# EAGLE board sensor_v3 (EAGLE 7.2.0)
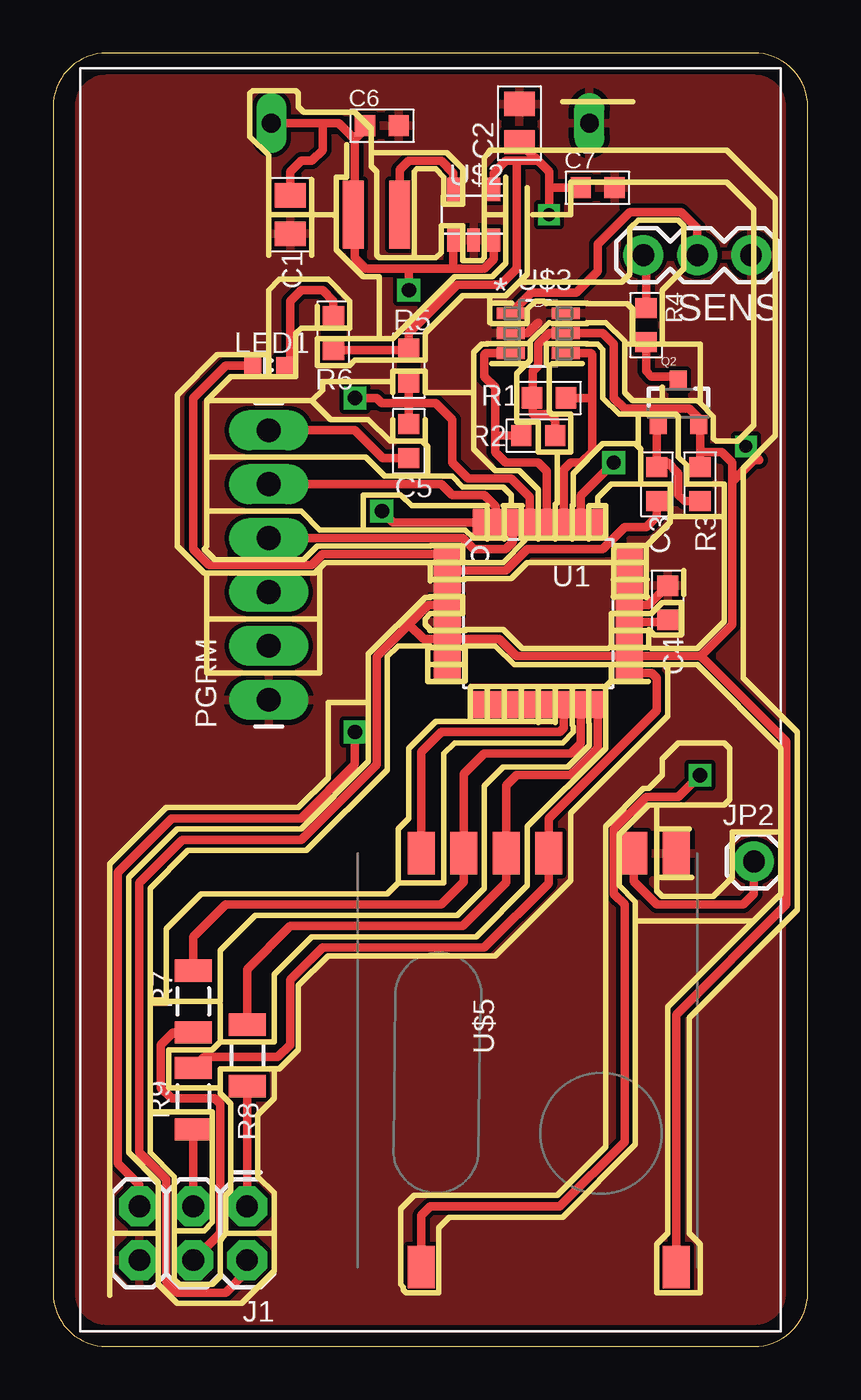
[diagram p0: board, top side]
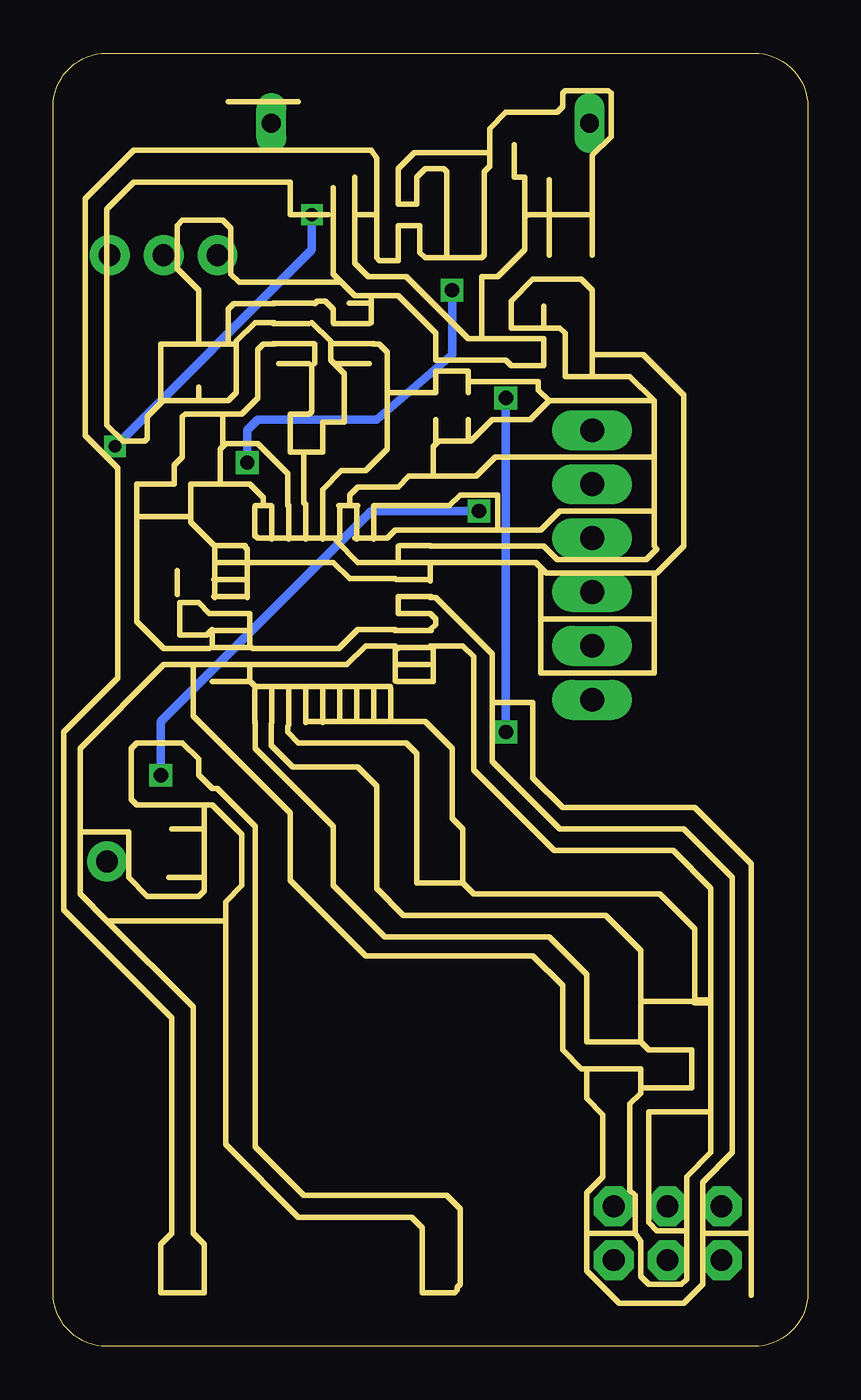
[diagram p1: board, bottom side, seen from below]

Size 35.56 x 60.96 mm. Coordinates in mm from the lower left corner, seen from the top.
Outline: 0,58.42 0,2.54 arc90 2.54,0 33.02,0 arc90 35.56,2.54 35.56,58.42 arc90 33.02,60.96 2.54,60.96 arc90 0,58.42
Copper layers (1*16): Top 0.035mm / dielectric 1.5mm / Bottom 0.035mm
Design rules "default": minimum track width 10mil, minimum drill 24mil, track to track 8mil, track to pad 8mil, pad to pad 8mil, via to via 8mil, smd to smd 8mil, copper to edge 40mil, drill to drill 8mil, minimum pad ring 10mil, minimum via ring 8mil, stop-mask expansion 4mil, vias tented up to drill 0mil, thermal gap 10mil
Milling: 481 lines

## Footprints (pad centres in the part's own frame; a part is rotated, then mirrored left to right if it is on the bottom)
C0805-N = smd 1.15 x 1.45: 1 -0.9,0; 2 0.9,0
C0603-N = smd 0.95 x 1: 1 -0.8,0; 2 0.8,0
2X3 = drill 1.016 pad 1.88 octagon: 1 0,0; 2 0,2.54; 3 2.54,0; 4 2.54,2.54; 5 5.08,0; 6 5.08,2.54
1X01 = drill 1.016 pad 1.88: 1 0,0
LED-0603 = smd 0.8 x 0.8: A 0,-0.75; C 0,0.75
1X06_LONGPADS = drill 1.118 pad 1.88 long: 1 0,0; 2 2.54,0; 3 5.08,0; 4 7.62,0; 5 10.16,0; 6 12.7,0
SOT23-3 = smd 0.8 x 0.9: 1 -0.95,-1; 2 0.95,-1; 3 0,1.1
R0603-N = smd 0.95 x 1: 1 -0.8,0; 2 0.8,0
R1206-N = smd 1.05 x 1.75: 1 -1.45,0; 2 1.45,0
1X03 = drill 1.016 pad 1.88: 1 0,0; 2 2.54,0; 3 5.08,0
TQFP32-08 = smd 1.27 x 0.559: 1 -4.293,2.8; 2 -4.293,2; 3 -4.293,1.2; 4 -4.293,0.4; 5 -4.293,-0.4; 6 -4.293,-1.2; 7 -4.293,-2; 8 -4.293,-2.8; 17 4.293,-2.8; 18 4.293,-2; 19 4.293,-1.2; 20 4.293,-0.4; 21 4.293,0.4; 22 4.293,1.2; 23 4.293,2; 24 4.293,2.8 | smd 0.559 x 1.27: 9 -2.8,-4.293; 10 -2,-4.293; 11 -1.2,-4.293; 12 -0.4,-4.293; 13 0.4,-4.293; 14 1.2,-4.293; 15 2,-4.293; 16 2.8,-4.293; 25 2.8,4.293; 26 2,4.293; 27 1.2,4.293; 28 0.4,4.293; 29 -0.4,4.293; 30 -1.2,4.293; 31 -2,4.293; 32 -2.8,4.293
KEYSTONEAAHOLDER_2CELL = drill 0.889 pad 1.422 long: P$1 -7.493,27.178; P$2 7.493,27.178
SOT23-5 = smd 0.6 x 1.1: P$1 -0.95,-1.2; P$2 0,-1.2; P$3 0.95,-1.2; P$4 0.95,1.2; P$5 -0.95,1.2
SOT95P270X145-6N = smd 1.321 x 0.559: 1 -1.295,0.94; 2 -1.295,0; 3 -1.295,-0.94; 4 1.295,-0.94; 5 1.295,0; 6 1.295,0.94
WURTH_10UH_650MA = smd 3.2 x 1: P$1 0,-1.1; P$2 0,1.1
RFM69W-MINPADS = smd 2 x 1.27: ANA 8,-5; DIO0 -11.5,5; GND 8,-7; MISO 8,1; MOSI 8,3; NSS 8,5; SCK 8,-1; VDD -11.5,-7

## Placement (x,y rotation side)
C1  10uF  [C0805-N]  11.18,53.34 270 top
C2  10uF  [C0805-N]  21.97,57.66 90 top
C3  0.1uF  [C0603-N]  28.45,40.64 270 top
C4  0.1uF  [C0603-N]  28.96,35.05 270 top
C5  0.1uF  [C0603-N]  16.76,42.67 270 top
C6  0.1uF  [C0603-N]  15.49,57.53 0 top
C7  0.1uF  [C0603-N]  25.65,54.61 0 top
J1  AVR_SPI_PRG_6PTH  [2X3]  9.14,6.6 180 top
JP2  M01PTH  [1X01]  33.02,22.86 0 top
LED1  [LED-0603]  10.16,46.23 90 top
PGRM  [1X06_LONGPADS]  10.16,30.48 90 top
Q2  MOSFET-PCHANNELIRLML2244  [SOT23-3]  29.46,44.45 0 top
R1  10k  [R0603-N]  22.86,42.93 0 top
R2  10k  [R0603-N]  23.37,44.7 180 top
R3  10k  [R0603-N]  30.48,40.64 90 top
R4  5.7-5.9k  [R0603-N]  27.94,48.13 270 top
R5  10k  [R0603-N]  16.76,46.23 90 top
R6  10k  [R0603-N]  13.21,47.75 90 top
R7  [R1206-N]  6.6,16.26 270 top
R8  [R1206-N]  9.14,13.72 270 top
R9  [R1206-N]  6.6,11.68 270 top
SENS  [1X03]  32.89,51.44 180 top
U1  ATMEGA328P  [TQFP32-08]  22.86,34.54 0 top
U$1  KEYSTONEAAHOLDER_2CELL  [KEYSTONEAAHOLDER_2CELL]  17.78,30.48 0 top
U$2  TPS61097-33  [SOT23-5]  19.81,53.34 0 top
U$3  MCP3425A0T-E/CH  [SOT95P270X145-6N]  22.86,47.75 0 top
U$4  INDUCTORS_WURTH  [WURTH_10UH_650MA]  15.24,53.34 90 top
U$5  RFM69  [RFM69W-MINPADS]  22.35,15.24 90 top

## Library data of the parts
C1-C7 R1-R9 = passives-7351
J1 JP2 PGRM SENS = SparkFun-Connectors
LED1 = SparkFun-LED
Q2 = SparkFun-DiscreteSemi; PROD_ID: TRANS-11153
U1 = SparkFun-DigitalIC; PROD_ID: IC-09069
U$1 U$2 U$4 = _my-parts
U$3 = Microchip_By_element14_Batch_1; MPN: MCP3425A0T-E/CH; OC_FARNELL: 1578433; OC_NEWARK: 88M9948; PACKAGE: SOT-6; SUPPLIER: Microchip
U$5 = LowPowerLab

## Nets
+3V3/2: R4.1 SENS.3
G: C3.1 Q2.1 R3.1
GND: C1.2 C2.2 C4.1 C6.2 C7.2 J1.6 PGRM.1 SENS.1 U1.3 U1.5 U1.21 U$1.P$2 U$2.P$2 U$3.2 U$3.6 U$5.GND
IRQ: U1.32 U$5.DIO0
MISO: R8.1 U1.16 U$5.MISO
MOSI: R7.1 U1.15 U$5.MOSI
N$1: U$2.P$5 U$4.P$1
N$2: Q2.3 R4.2
N$4: C4.2 U1.20
N$5: LED1.C U1.1
N$6: SENS.2 U$3.1
N$7: JP2.1 U$5.ANA
N$8: J1.3 R9.2
N$9: LED1.A R6.2
N$10: C5.2 PGRM.6
N$11: J1.1 R8.2
N$12: J1.4 R7.2
RST: C5.1 J1.5 R5.1 U1.29
RX: PGRM.4 U1.30
SCK: R9.1 U1.17 U$5.SCK
SCL: R1.1 U1.28 U$3.3
SDA: R2.1 U1.27 U$3.4
SENS_EN: C3.2 U1.2
SS: U1.14 U$5.NSS
TX: PGRM.5 U1.31
V3.3: C2.1 C7.1 J1.2 Q2.2 R1.2 R2.2 R3.2 R5.2 R6.1 U1.4 U1.6 U1.18 U$2.P$4 U$3.5 U$5.VDD
VBAT: C1.1 C6.1 U1.26 U$1.P$1 U$2.P$1 U$2.P$3 U$4.P$2

## Tracks (layer width: path | path; a pad name or v marks a point on that pad's centre or on a via)
+3V3/2
  Top 0.406: SENS.3 27.94,51.44 R4.1
G
  Top 0.406: R3.1 29.76,39.84 29.46,40.13 29.46,41.15 28.96,41.66 28.66,41.66 C3.1 28.45,43.38 Q2.1
GND
  Top 0.406: U$3.2 22.35,47.75 22.86,48.26 | U1.21 28.05,34.94 C4.1
  pour Top: -1.27,-1.27 36.83,-1.27 36.83,62.23 -1.27,62.23
IRQ  (via drill 0.67)
  Top 0.406: U$5.DIO0 17.35,6.18 17.78,6.6 23.88,6.6 26.92,9.65 26.92,20.83 26.42,21.34 26.42,24.38 27.94,25.91 29.46,25.91 v30.48,26.92 | v15.49,39.37 16.03,38.84 U1.32
  Bottom 0.406: v30.48,26.92 30.48,29.46 20.57,39.37 v15.49,39.37
MISO
  Top 0.406: U1.16 25.66,28.2 24.38,26.92 21.84,26.92 21.35,26.43 U$5.MISO 21.35,21.86 19.3,19.81 11.18,19.81 9.14,17.78 R8.1
MOSI
  Top 0.406: U1.15 24.86,28.42 24.38,27.94 20.32,27.94 19.35,26.97 U$5.MOSI 19.35,21.89 18.29,20.83 8.13,20.83 6.6,19.3 R7.1
N$1
  Top 0.406: U$4.P$1 16.34,55.46 16.76,55.88 18.29,55.88 18.86,55.31 U$2.P$5
N$2
  Top 0.406: R4.2 27.94,45.97 28.19,45.72 29.29,45.72 Q2.3
N$4
  Top 0.406: U1.20 28.85,34.14 C4.2
N$5
  Top 0.406: U1.1 12.71,37.34 12.19,36.83 7.37,36.83 6.6,37.59 6.6,44.7 8.13,46.23 LED1.C
N$6
  Top 0.406: SENS.2 30.35,52.7 29.59,53.47 27.18,53.47 25.65,51.94 25.65,50.67 24.64,49.66 22.53,49.66 U$3.1
N$7
  Top 0.406: U$5.ANA 27.35,21.92 28.45,20.83 32.51,20.83 33.02,21.34 JP2.1
N$8
  Top 0.406: J1.3 R9.2
N$9
  Top 0.406: R6.2 13.21,49.28 12.7,49.78 11.68,49.78 11.18,49.28 11.18,46.49 LED1.A
N$10
  Top 0.406: C5.2 15.53,41.87 14.22,43.18 PGRM.6
N$11
  Top 0.406: J1.1 R8.2
N$12
  Top 0.406: J1.4 7.87,5.33 7.87,11.43 7.62,11.68 5.59,11.68 5.08,12.19 5.08,14.22 5.66,14.81 R7.2
RST  (via drill 0.67)
  Top 0.406: U1.29 22.46,40.02 21.59,40.89 19.56,40.89 18.8,41.66 18.8,43.69 18.03,44.45 16.76,44.45 | 16.76,44.45 R5.1 | C5.1 16.76,44.45 | J1.5 4.06,7.62 3.05,8.64 3.05,22.35 5.59,24.89 11.68,24.89 14.22,27.43 v14.22,28.96 | 16.76,44.45 15.49,44.45 15.24,44.7 v14.22,44.7
  Bottom 0.406: v14.22,28.96 v14.22,44.7
RX
  Top 0.406: U1.30 21.66,37.92 21.34,37.59 19.81,37.59 19.3,38.1 PGRM.4
SCK
  Top 0.406: U1.17 28.2,31.74 28.45,31.5 28.45,29.97 23.35,24.88 U$5.SCK 23.35,21.83 20.32,18.8 12.7,18.8 11.18,17.27 11.18,14.22 10.59,13.64 7.11,13.64 R9.1
SCL
  Top 0.406: U1.28 23.26,41.26 22.86,41.66 21.34,41.66 20.83,42.16 20.83,42.93 | 20.83,42.93 20.83,45.21 20.32,45.72 20.32,46.74 20.4,46.81 U$3.3 | R1.1 20.83,42.93
SDA
  Top 0.406: U1.27 24.06,41.33 24.38,41.66 24.89,41.66 25.4,42.16 25.4,44.7 | 25.4,44.7 25.4,46.74 25.32,46.81 U$3.4 | R2.1 25.4,44.7
SENS_EN
  Top 0.406: U1.2 18.6,36.58 21.34,36.58 22.35,37.59 25.91,37.59 26.92,38.61 27.94,38.61 28.45,39.12 C3.2
SS
  Top 0.406: U1.14 24.06,29.14 23.88,28.96 18.29,28.96 17.35,28.02 U$5.NSS
TX
  Top 0.406: U1.31 20.86,39.59 20.32,40.13 18.8,40.13 18.29,40.64 PGRM.5
V3.3  (via drill 0.6)
  Top 0.406: R1.2 23.66,43.65 23.37,43.94 22.61,43.94 22.61,44.67 | 22.61,44.67 R2.2 | 22.61,44.67 22.61,45.97 22.86,46.23 22.86,47.24 23.37,47.75 U$3.5 25.91,47.75 26.42,47.24 26.42,44.7 26.92,44.2 29.97,44.2 30.41,43.75 Q2.2 30.48,43.38 30.48,42.16 | 30.51,32.54 U1.18 21.81,32.54 21.01,33.34 U1.6 17.46,33.34 16.76,34.04 | 30.51,32.54 32,34.04 32,40.77 | 32,40.77 32,41.66 31.5,42.16 30.48,42.16 | R3.2 30.48,42.16 | U$5.VDD 29.35,15.64 34.54,20.83 34.54,28.51 30.51,32.54 | U$2.P$4 20.76,55.31 21.34,55.88 21.84,55.88 | 21.84,55.88 22.86,55.88 23.37,55.37 | C2.1 23.37,55.37 | 21.84,55.88 21.84,50.8 21.08,50.04 19.05,50.04 16.76,47.75 R5.2 16.69,46.95 R6.1 | 16.76,34.04 15.24,32.51 15.24,27.43 11.68,23.88 6.1,23.88 4.06,21.84 4.06,9.14 5.33,7.87 5.33,3.05 5.84,2.54 8.13,2.54 9.14,3.56 J1.2 | 16.76,34.04 17.67,34.94 U1.4 | 23.37,55.37 23.37,54.74 | 23.37,54.74 v23.37,53.34 | v32.64,42.42 33.27,41.78 33.02,41.78 32,40.77 | C7.1 23.5,54.61 23.37,54.74
  Bottom 0.406: v23.37,53.34 23.37,51.69 v32.64,42.42
VBAT  (via drill 0.67)
  Top 0.406: U1.26 24.86,40.1 v26.42,41.66 | U$2.P$3 20.76,51.24 20.32,50.8 18.8,50.8 | U$1.P$1 12.7,57.66 | 12.7,57.66 13.46,57.66 14.22,56.9 | 14.22,56.9 14.22,53.42 U$4.P$2 14.22,53.26 14.22,51.31 14.73,50.8 16.76,50.8 | C1.1 11.18,55.37 11.68,55.88 12.19,55.88 12.7,56.39 12.7,57.66 | 16.76,50.8 v16.76,49.78 | 16.76,50.8 18.8,50.8 | U$2.P$1 18.86,50.87 18.8,50.8 | C6.1 14.69,57.37 14.22,56.9
  Bottom 0.406: v26.42,41.66 26.42,43.18 25.91,43.69 20.32,43.69 16.76,46.74 v16.76,49.78